# Altium PCB Project_MachNguon.PcbDoc
Units mm, origin at the board's own origin, x right, y up, seen from the top; angles counter-clockwise.
Board outline 93.1 x 50.04 mm, 2 copper layers (Top Layer, Bottom Layer); 54 components, 33 nets, 136 pads, 11 vias.
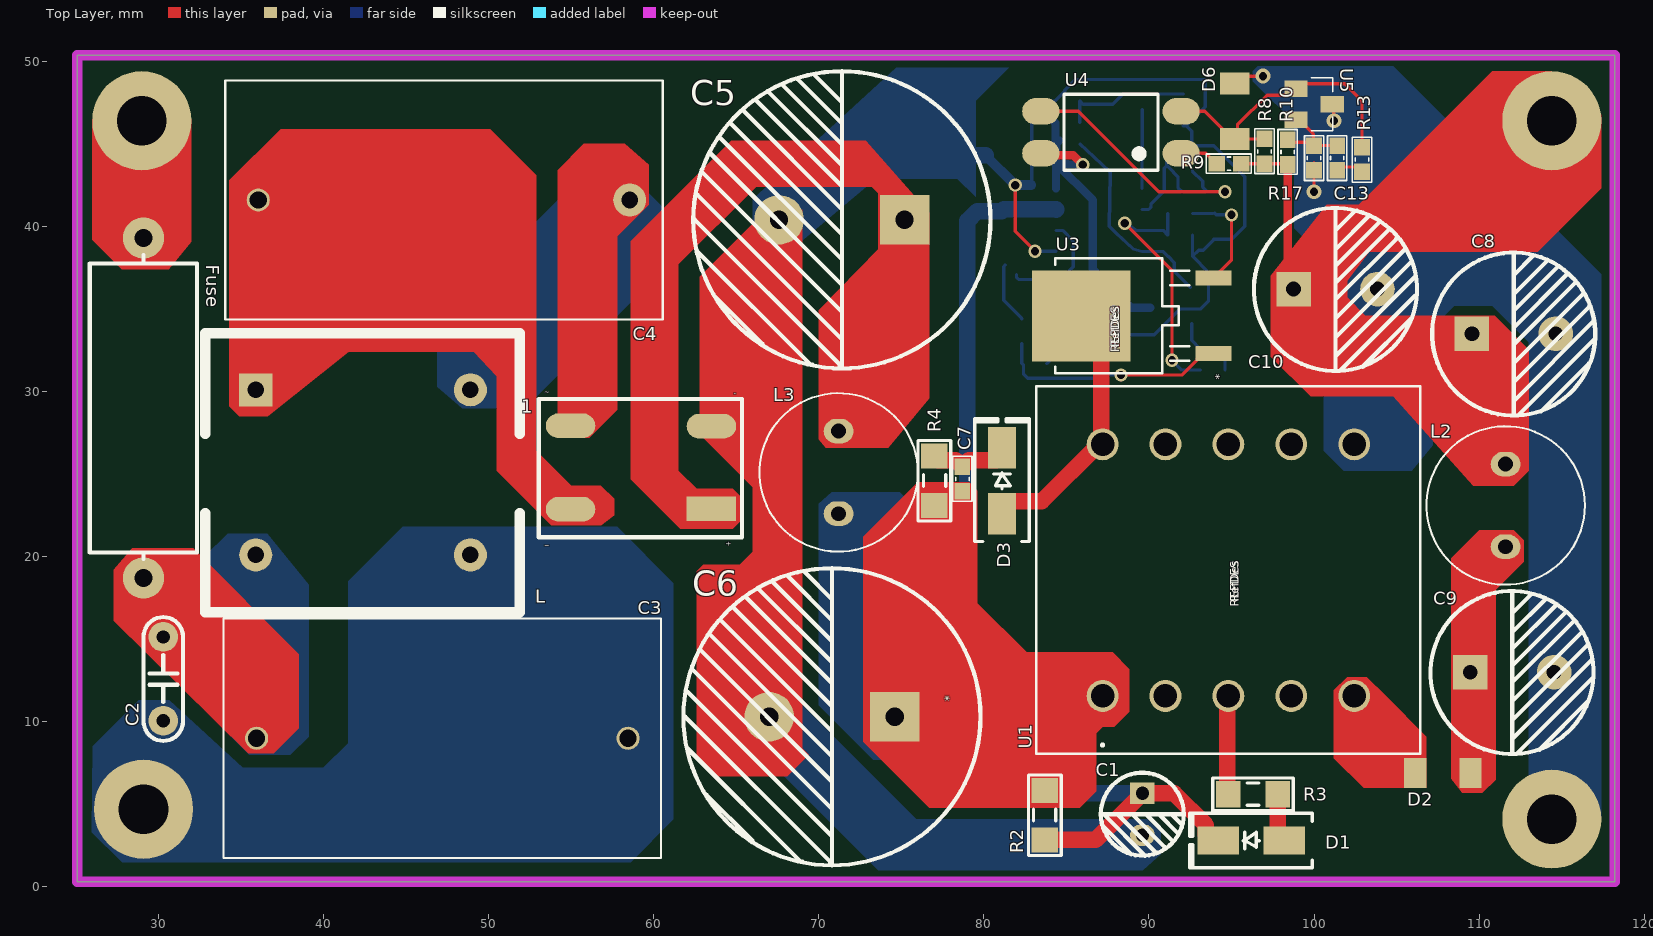
[diagram p0: Top Layer view]
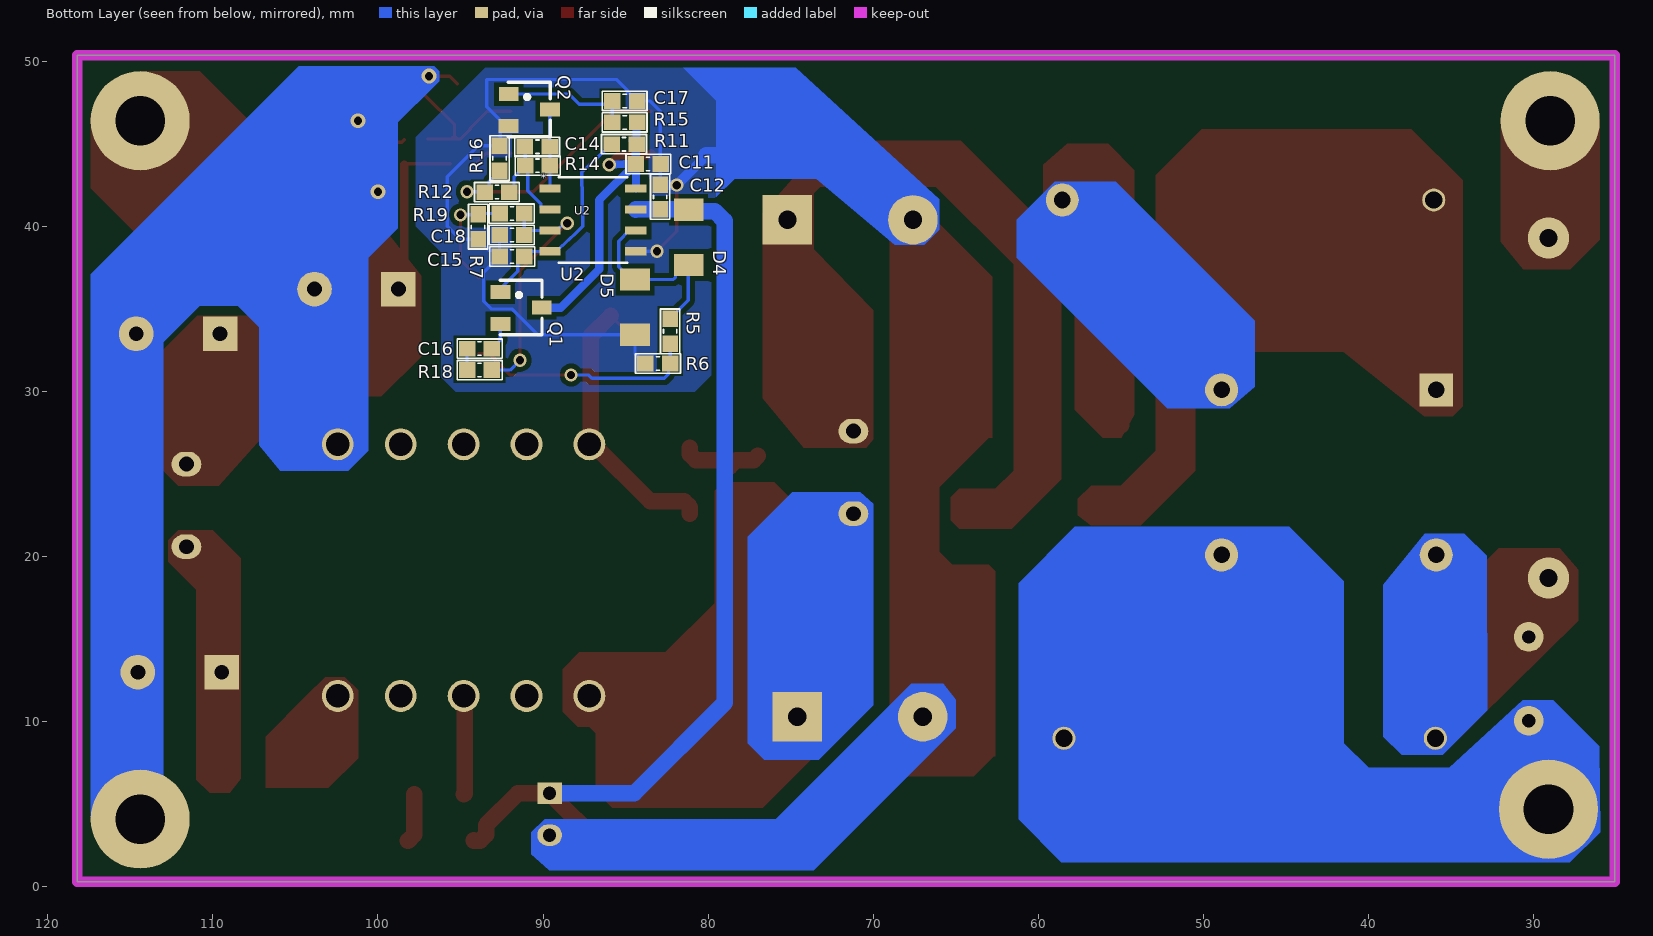
[diagram p1: Bottom Layer view, seen from below]
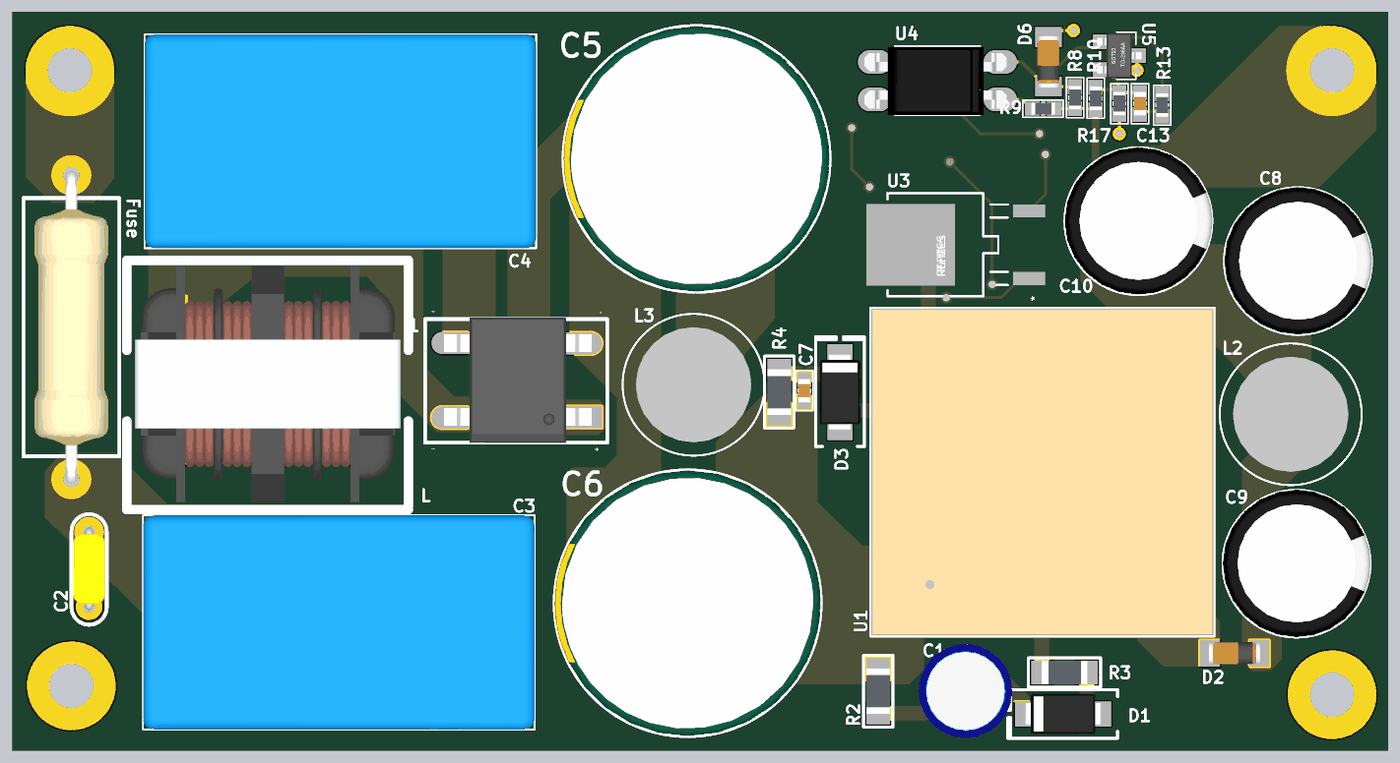
[diagram p2: 3D render of the assembled board from above, using the file's embedded part models]
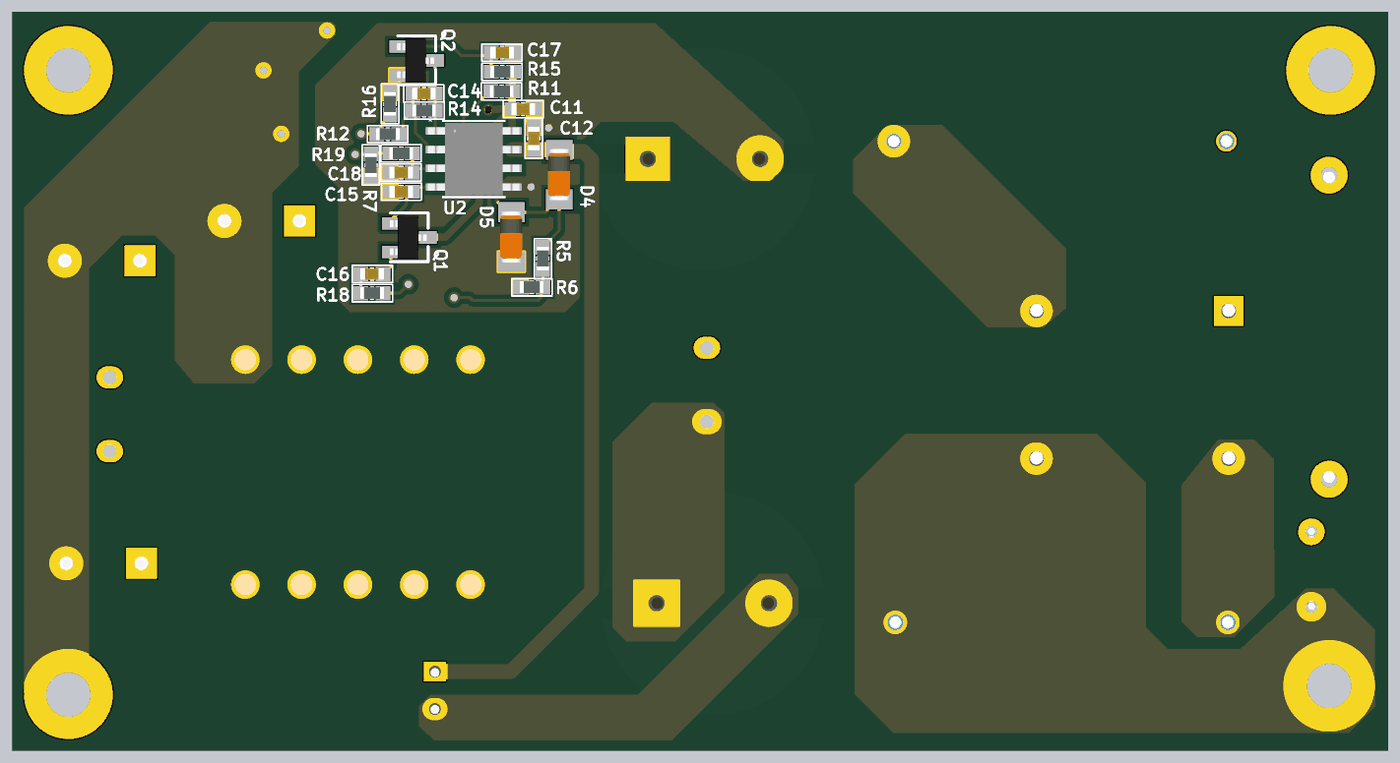
[diagram p3: 3D render of the assembled board from below, using the file's embedded part models]

## Layer stack, top to bottom
Top Solder: solder mask 0.0102, Solder Resist, Dk 3.5
Top Layer: signal copper 0.0356
Dielectric 1: dielectric 0.32, FR-4, Dk 4.8
Bottom Layer: signal copper 0.0356
Bottom Solder: solder mask 0.0102, Solder Resist, Dk 3.5

## Board outline
25.1,0.318 25.1,50.355 118.2,50.355 118.2,0.318

## Design rules (kind name [scope] priority, off if disabled: settings)
Clearance [All] p1: gap=0.3 ignorepadtopadclearanceinfootprint=FALSE
Height [All] p1 off: minheight=0 maxheight=25.4 prefheight=12.7
PolygonConnect [All] p1: connectstyle=Direct reliefconductorwidth=0.254 reliefentries=4 polygonreliefangle="90 Angle" airgapwidth=0.254
RoutingVias [All] p1: holewidth=0.711 width=1.27 viastyle="Through Hole" minholewidth=0.711 minwidth=1.27 maxholewidth=0.711 maxwidth=1.27
SolderMaskExpansion [All] p1: expansion=0.102 istentingtop=FALSE
SupplyNets "Schematic Supply Nets_1" [InNet('A_GND')] p1: voltage=0.000
SupplyNets "Schematic Supply Nets" [InNet('GND')] p2: voltage=0.000
Width [All] p1: maxlimit=1 minlimit=0.2 preferedwidth=0.2
29 further rules are at their usual default settings.

## Components (designator, comment, footprint, x,y, rotation, side; value= is the part's Value field where it differs from the comment)
1 "1A 1000V" "DIODE CAU 1A SMD SOP4" 63.5,22.9 r90 top
C1 "120uF" "tu hoa 5mm" 89.6,4.4 r270 top
C2 "750V" "tu tantalum dip5.08" 30.3,12.6 r270 top
C3 "B32923P3155K000" CAPRR2250W80L2650T1450H2950#1 47.2,9 r180 top
C4 "B32923P3155K000" CAPRR2250W80L2650T1450H2950#2 47.3,41.6 r180 top
C5 "10uF" "tu Hoa 18mm" 71.4,40.4 r0 top
C6 "10uF" "tu Hoa 18mm" 70.8,10.3 r0 top
C7 "10nF" "tu 0603" 78.7,24.7 r90 top
C8 "10uF" "tu hoa 10mm" 112.1,33.5 r0 top
C9 "10uF" "tu hoa 10mm" 112,13 r0 top
C10 "10uF" "tu hoa 10mm" 101.3,36.2 r0 top
C11 "1uF" "tu 0603" 83.633,43.779 r180 bottom
C12 "0.1uF" "tu 0603" 82.908,41.787 r90 bottom
C13 "0.01uF" "tu 0603" 101.4,44.15 r270 top
C14 "10nF" "tu 0603" 90.346,44.824 r0 bottom
C15 "1000pF" "tu 0603" 91.883,38.179 r180 bottom
C16 "10nF" "tu 0603" 93.85,32.6 r180 bottom
C17 "0.1uF" "tu 0603" 85.05,47.6 r0 bottom
C18 "100pF" "tu 0603" 91.883,39.479 r0 bottom
D1 "M7" "DIODE SMA" 96.2,2.8 r180 top
D2 "12V" "DIODE ZENNER SMD SOD80" 107.8,6.9 r180 top
D3 "M7" "DIODE SMA" 81.1,24.6 r90 top
D4 "24V" "DIODE ZENNER SMD SOD80" 81.183,39.34 r270 bottom
D5 "24V" "DIODE ZENNER SMD SOD80" 84.433,35.11 r270 bottom
D6 "10V" "DIODE ZENNER SMD SOD80" 95.2,46.975 r90 top
Fuse "50" "tro vach 2w" 29.1,29 r270 top
L "7416-RC" 7416-RC 35.9,30.1 r0 top
L2 "RFB0810-122L" IND_P220_D378_H452_70X59_TH 111.6,23.1 r90 top
L3 "RFB0810-122L" IND_P220_D378_H452_70X59_TH 71.2,25.1 r270 top
Q1 "HF" SOT-23 91.333,35.085 r270 bottom value=C9014
Q2 "HF" SOT-23 90.833,47.079 r270 bottom value=C9014
R2 "100k" "RES 1206" 83.693,4.34 r90 top
R3 "22R" "RES 1206" 96.3,5.6 r0 top
R4 "50K" "RES 1206" 77,24.6 r270 top
R5 "?" "RES 0603" 82.3,33.65 r270 bottom
R6 "?" "RES 0603" 83.05,31.7 r180 bottom
R7 "?" "RES 0603" 93.933,39.979 r90 bottom
R8 "?" "RES 0603" 97,44.55 r90 top
R9 "?" "RES 0603" 94.85,43.8 r180 top
R10 "?" "RES 0603" 98.4,44.5 r90 top
R11 "?" "RES 0603" 85.083,44.979 r0 bottom
R12 "?" "RES 0603" 92.783,42.079 r0 bottom
R13 "?" "RES 0603" 102.9,44.05 r270 top
R14 "?" "RES 0603" 90.333,43.679 r180 bottom
R15 "?" "RES 0603" 85.05,46.3 r0 bottom
R16 "?" "RES 0603" 92.633,44.129 r90 bottom
R17 "?" "RES 0603" 100,44.15 r270 top
R18 "?" "RES 0603" 93.85,31.3 r180 bottom
R19 "?" "RES 0603" 91.883,40.779 r0 bottom
U1 "750312279" 750312279_WRE 87.19,11.56 r90 top
U2 "UC3842BD1G" SOIC8_ONS-L 86.977,40.39 r180 bottom
U3 "STD2NK100Z" DPAK_STM-L 87.563,34.586 r90 top
U4 "OPTO PC817 SMD" SOP4 87.7,45.7 r180 top value=PC817
U5 "TL431ACDBZT" "SOT 23-3" 100,47.4 r180 top

## Footprints (in the part's own frame and the unit in brackets; to place one, negate y for a bottom-side part, rotate by r counter-clockwise, add the part's x,y. Pads: shape width x height; smd on the part's side, far side on the other; paste and mask are expansions set on the pad)
7416-RC [mm]
  rect 2x2 hole 1: 1(0,0)
  round 2 hole 1: 2(0,-10) 3(13,-10) 4(13,0)
  silkscreen extent -3.05,-13.46 16,3.43, body extent -2.51,-12.95 15.49,3.05, height 17.5
750312279_WRE [mil]
  round 76 / inner round 60 / far side round 76 hole 56 paste-99999 mask+0: 1(0,0) 2(0,-150) 3(0,-300) 4(0,-450) 5(0,-600) 6(600,-600) 7(600,-450) 8(600,-300) 9(600,-150) 10(600,0)
  silkscreen extent -138,-758 738,158, body extent -133,-753 733,153, height 690
CAPRR2250W80L2650T1450H2950#1 [mm]
  round 1.4 hole 1.05: 1(-11.25,0) 2(11.25,0)
  silkscreen extent -13.25,-7.25 13.25,7.25, body extent -13.25,-7.25 13.25,7.25, height 29.5
CAPRR2250W80L2650T1450H2950#2 [mm]
  round 2 hole 1: 1(-11.25,0)
  round 1.4 hole 1.05: 2(11.25,0)
  silkscreen extent -13.25,-7.25 13.25,7.25, body extent -13.25,-7.25 13.25,7.25, height 29.5
"DIODE CAU 1A SMD SOP4" [mm] "SOP4"
  rect 1.5x3 smd: 1(0,0)
  oval 1.5x3 smd: 2(5.029,8.534) 3(5,0) 4(-0.025,8.534)
  silkscreen extent -1.73,-1.85 6.65,10.46, body extent -1.74,-0.81 6.76,9.19, height 2.93
"DIODE SMA" [mm] "SMA"
  rect 2.5x1.7 smd: 1(-2,0) 2(2,0)
  silkscreen extent -3.68,-1.65 3.75,1.65, body extent -2.6,-1.37 2.6,1.37, height 2.4
"DIODE ZENNER SMD SOD80" [mm] "SOD80"
  rect 1.35x1.8 smd: 1(1.675,0) 2(-1.675,0)
  body extent -1.75,-0.76 1.75,0.74, height 1.45
DPAK_STM-L [mil]
  rect 35x86 smd paste+0 mask+0: 1(-90,-249.5) 2(90,-249.5)
  rect 217x236 smd paste+0 mask+0: 3(0,65.5)
  silkscreen extent -138,-192 138,128
IND_P220_D378_H452_70X59_TH [mm] "Inductor"
  oval 1.5x1.8 hole 0.9: 1(-2.5,0) 2(2.5,0)
  silkscreen extent -4.8,-4.8 4.8,4.8, body extent -3.9,-3.9 3.9,3.9, height 7.82
"RES 0603" [mm] "RES 0603"
  rect 1x0.95 smd mask+0.076: 1(-0.75,0) 2(0.75,0)
  silkscreen extent -1.35,-0.58 1.37,0.58, body extent -0.8,-0.4 0.8,0.4, height 0.45
"RES 1206" [mm]
  rect 1.5x1.6 smd: 1(-1.5,0) 2(1.5,0)
  silkscreen extent -2.44,-0.99 2.44,0.99, body extent -1.55,-0.8 1.55,0.8, height 0.55
SOIC8_ONS-L [mil]
  rect 51x20 smd paste+0 mask+0: 1(-102.5,75) 2(-102.5,25) 3(-102.5,-25) 4(-102.5,-75) 5(102.5,-75) 6(102.5,-25) 7(102.5,25) 8(102.5,75)
  silkscreen extent -82,-102 82,102, body extent -122,-96 122,96, height 69
SOP4 [mm]
  oval 2.25x1.6 smd: 1(-4.25,1.27) 2(-4.25,-1.27) 3(4.25,-1.27) 4(4.25,1.27)
  silkscreen extent -2.85,-2.3 2.85,2.3, body extent -4.67,-2.29 4.93,2.31, height 3.6
"SOT 23-3" [mm] "Case: SOT23"
  rect 1.4x1 smd paste+0 mask+0.076: 1(1.1,-0.95) 2(1.1,0.95) 3(-1.1,0)
  silkscreen extent -1.12,-1.6 0.18,1.6, body extent -1.5,-1.5 1.5,1.5, height 1.3
SOT-23 [mm] "SOT 23 _ 1-3-2"
  rect 0.85x1.2 smd: 1(-0.94,-1.245) 2(0.985,-1.25) 3(0.005,1.25)
  silkscreen extent -1.65,-1.27 1.65,1.27, body extent -1.47,-1.33 1.53,1.17, height 1.06
"tro vach 2w" [mm]
  round 2.5 hole 1.1: 1(-10.3,0) 2(10.3,0)
  silkscreen extent -9.27,-3.25 9.14,3.25, body extent -10.56,-2.5 10.56,2.5, height 5.5
"tu 0603" [mm] "Chip Capacitor, 2-Leads, Body 1,60x0,80mm, IPC Medium Density"
  rect 1x0.95 smd mask+0.076: 1(-0.75,0) 2(0.75,0)
  silkscreen extent -1.35,-0.58 1.37,0.58, body extent -0.8,-0.4 0.8,0.4, height 0.9
"tu hoa 5mm" [mm]
  rect 1.3x1.5 hole 0.8: 1(-1.27,0)
  oval 1.3x1.5 hole 0.8: 2(1.27,0)
  silkscreen extent -2.51,-2.51 2.51,2.51, body extent -3.12,-3.18 3.23,3.18, height 14.55
"tu hoa 10mm" [mm]
  rect 2.1x2.1 hole 0.9: 1(-2.54,0)
  round 2.1 hole 0.9: 2(2.54,0)
  silkscreen extent -4.95,-4.96 4.93,4.92, body extent -5,-5 4.97,5, height 20.01
"tu Hoa 18mm" [mm]
  rect 3x3 hole 1.1: 1(3.8,0)
  round 3 hole 1.1: 2(-3.8,0)
  silkscreen extent -9,-9 9,9, body extent -9.01,-9 9,9, height 3
"tu tantalum dip5.08" [mm]
  round 1.8 hole 0.8: 1(-2.54,0) 2(2.54,0)
  silkscreen extent -3.74,-1.2 3.76,1.2, body extent -2.82,-1.08 2.77,1.08, height 6.27

## Part data
1: library part "Diode CAU 1A SMD", "Dán", Chung_Loai=Dán, Don_Vi=Con, Ma_Hang=MH009806, Ten_Linh_Kien="DBS10 SOP4 Diode Cầu 1A 1000V"
C1: library part "Tu Hoa 100uF 25V 6x11", "Cắm", Chung_Loai=Cắm, Don_Vi=Con, Ma_Hang=MH001351, So_Chan=2, Ten_Linh_Kien="Tụ Hóa 100uF 25V 6x11MM"
C2: library part "Tu tantalum 100pF DIP5.08", "Cắm", Chung_Loai=Cắm, Don_Vi=Con, Ma_Hang=MH006964, So_Chan=2, Ten_Linh_Kien="Tụ tantalum 101-100pF DIP5.08 (sứ vàng)"
C3 C4: "SUPPRESSION CAP, 1.5UF, CLASS X2, 305VAC ROHS COMPLIANT: YES", Package="NON-STANDARD-2 TDK", Check_prices=https://www.snapeda.com/parts/B32923P3155K000/TDK/view-part/?ref=eda, MF="TDK Electronics", MP=B32923P3155K000, SnapEDA_Link=https://www.snapeda.com/parts/B32923P3155K000/TDK/view-part/?ref=snap
C5 C6: library part "Tu Hoa 100uF 450V 18x35", "Cắm", Chung_Loai=Cắm, Don_Vi=Con, Ma_Hang=MH003953, So_Chan=2, Ten_Linh_Kien="Tụ Hóa 100uF 450V 18x35MM"
C7: library part "Tu 0603 105 50V 10%", "Dán", Chung_Loai=Dán, Don_Vi=Con, Ma_Hang=MH004569, So_Chan=2, Ten_Linh_Kien="Tụ 0603 105-1uF 50V 10%"
C8 C9 C10: library part "Tu Hoa 1000uF 10V 10x12", "Cắm", Chung_Loai=Cắm, Don_Vi=Con, Ma_Hang=MH006614, So_Chan=2, Ten_Linh_Kien="Tụ Hóa 1000uF 10V 10x12MM"
C11 C12 C13 C14 C15 C16 C17 C18: library part "Tu 0603 101 50V 10%", "Dán", Chung_Loai=Dán, Don_Vi=Con, Ma_Hang=MH004565, So_Chan=2, Ten_Linh_Kien="Tụ 0603 101-0.1nF 10% 50V"
D1 D3: library part "Diode M7 ( 4007 )", "Dán", Chung_Loai=Dán, Don_Vi=Con, Ma_Hang=MH000944, Ten_Linh_Kien="Diode M7 1N4007 SMD 1A 1000V"
D2 D6: library part "Diode Zener 12V", "Dán", Chung_Loai=Dán, Don_Vi=Con, Ma_Hang=MH000945, Ten_Linh_Kien="Diode Zener 1/2W 12V SMD1206 ZMM12"
D4 D5: library part "Diode Zener 24V", "Cắm", Chung_Loai=Cắm, Don_Vi=Con, Ma_Hang=MH002878, Ten_Linh_Kien="Diode Zener 1/2W 24V DIP 1N5252B"
Fuse: library part "Tro Vach 2W 5% 100R", "Cắm", Chung_Loai=Cắm, Don_Vi=Con, Ma_Hang=MH006357, So_Chan=2, Ten_Linh_Kien="Trở 5% 2w 100R"
L2 L3: library part IND_1.2mH-0.47A-10%-TH, "Fixed Inductors RFB0810 AEC-Q200 100kHz 2.8mOhms", Alternate Part Number-1=NA, Case/Package=TH, Manufacturer=Coilcraft, Manufacturer Part Number=RFB0810-122L, Supplier Part Number-1=RFB0810-122L, Supplier-1="COILCRAFT SAMPLE"
Q1 Q2: library part "Trans C1815 HF SMD", "SOT-23"
R2 R3 R4: library part "RES 1206", "RES SMD 1206", Manufacturer="Vishay Dale", Manufacturer Part Number=CRCW040210K0FKED, Operating Temperature="-55°C ~ 155°C", Package / Case="0402 (1005 Metric)", Power (Watts)="0.063W, 1/16W", Resistance (Ohms)=10k, Supplier Part Number 1=541-10.0KLCT-ND, Temperature Coefficient=±100ppm/°C, Tolerance=±1%, Category=Resistors, ComponentLink1Description=http://www.vishay.com/docs/20035/dcrcwe3.pdf, ComponentLink1URL=http://www.vishay.com/docs/20035/dcrcwe3.pdf, Composition="Thick Film", Features="Automotive AEC-Q200", Height="0.016\" (0.40mm)", Number of Terminations=2, Packaging="Cut Tape (CT)", Pricing 1="10=0.083, 50=0.0444, 200=0.0255, 1000=0.0174 (USD)", RoHS="RoHS Compliant", Size / Dimension="0.039\" L x 0.020\" W (1.00mm x 0.50mm)", Stock 1=2392462, Supplier 1=Digi-Key, Supplier Device Package="0402 (1005 Metric)"
R5 R6 R7 R8 R9 R10 R11 R12 R13 R14 R15 R16 R17 R18 R19: library part "RES 0603", "RES SMD 0603", Manufacturer="Vishay Dale", Manufacturer Part Number=CRCW040210K0FKED, Operating Temperature="-55°C ~ 155°C", Package / Case="0402 (1005 Metric)", Power (Watts)="0.063W, 1/16W", Resistance (Ohms)=10k, Supplier Part Number 1=541-10.0KLCT-ND, Temperature Coefficient=±100ppm/°C, Tolerance=±1%, Category=Resistors, ComponentLink1Description=http://www.vishay.com/docs/20035/dcrcwe3.pdf, ComponentLink1URL=http://www.vishay.com/docs/20035/dcrcwe3.pdf, Composition="Thick Film", Features="Automotive AEC-Q200", Height="0.016\" (0.40mm)", Number of Terminations=2, Packaging="Cut Tape (CT)", Pricing 1="10=0.083, 50=0.0444, 200=0.0255, 1000=0.0174 (USD)", RoHS="RoHS Compliant", Size / Dimension="0.039\" L x 0.020\" W (1.00mm x 0.50mm)", Stock 1=2392462, Supplier 1=Digi-Key, Supplier Device Package="0402 (1005 Metric)"
U1: "Description", Manufacturer_Name="Wurth Electronics", Copyright="Copyright (C) 2025 Ultra Librarian. All rights reserved.", Manufacturer_Part_Number=750312279, RefDes=RefDes, Type=Type
U2: "No Description Available", Manufacturer_Name=onsemi, Copyright="Copyright (C) 2025 Ultra Librarian. All rights reserved.", Manufacturer_Part_Number=UC3842BD1G, RefDes=RefDes, Type=Type
U3: "N-channel 1000 V, 6.25 Ohm typ., 1.85 A SuperMESH Power MOSFET in a DPAK package", Manufacturer_Name=STMicroelectronics, Copyright="Copyright (C) 2025 Ultra Librarian. All rights reserved.", Manufacturer_Part_Number=STD2NK100Z
U4: "Single Opto"
U5: library part IC_TL431ACDBZT, "Shunt Voltage Reference IC 36V ±1% SOT-23-3", Alternate Part Number-1=NA, Case/Package=SOT-23, Manufacturer="Texas Instruments", Supplier Part Number-1=595-TL431ACDBZT, Manufacturer Part Number=TL431ACDBZT, Supplier-1=Mouser

## Free pads (board coordinates)
  round 6 hole 3: 10(29,46.4) 10(29.1,4.7) 10(114.4,4.1) 10(114.4,46.4)

## Via types
v1: diameter 0.8, hole 0.5, Top Layer to Bottom Layer, tented both sides, 8 vias
v2: diameter 0.9, hole 0.5, Top Layer to Bottom Layer, 3 vias

## Nets (pads, with @x,y where several pads share a name; then routed paths per layer and width w, separated by ;. In a path a pad name is that pad's centre, name@x,y a point inside that pad or via, vN(x,y) a via of type N, cw(c..) or ccw(c..) an arc to the next point about the centre after c; other vN are vias at no path point)
A_GND: 1.3 C1.2 C5.2 C6.2 C11.2 C12.2 C15.1 C17.1 C18.2 D5.1 Q2.2 R6.1 R7.1 R16.2 U2.5 | length 131.8
  Top Layer w0.2: v1(81.9,42.5) 81.9,39.7 v1(83.1,38.5)
  Top Layer w1: C6.2@66.8,10.5 66.8,10.986 67.9,12.086 67.9,24.2 64.2,27.9 1.3 63.869,27.9 64.1,28.131 64.1,36.9 C5.2
  Bottom Layer w0.2: C12.2@82.871,42.5 C12.2 82.908,43.753 C11.2 82.908,43.804 82.908,46.969 83.539,47.6 C17.1 84.325,47.6 84.9,48.175 84.9,48.241 85.559,48.9 93.4,48.9 93.4,47.235 Q2.2@92.258,46.093 ; v1(83.1,38.5) 83.108,38.492 84.366,38.492 U2.5 ; R6.1 83.825,31.7 84.433,32.308 D5.1 90.328,33.435 91.893,35 93.143,35 93.6,35.457 93.6,37.237 92.658,38.179 C15.1 ; Q2.2 Q2.2@92.258,46.093 ; C18.2 C15.1 ; Q2.2@92.258,46.093 92.583,45.768 92.583,44.929 R16.2 93.921,44.879 95.8,43 95.8,40 95.029,39.229 R7.1 93.933,39.204 93.283,38.554 93.008,38.554 C15.1
  Bottom Layer w0.6: 80.1,44.3 v1(81.9,42.5) C12.2@82.871,42.5
  Bottom Layer w1: C6.2@66.8,10.5 74.17,3.13 C1.2 ; C5.2 71.5,44.3 80.1,44.3
COMP: C14.1 Q2.3 R14.2 U2.1 | length 4.8
  Bottom Layer w0.2: U2.1 89.581,43.676 R14.2 89.583,44.811 C14.1 89.596,47.061 Q2.3
GND: C8.2 C9.2 C10.2 D6.1 pad.10@114.4,4.1 R17.2 U1.6 U5.3 | length 73.4
  Top Layer w0.2: D6.1 95.65,49.1 v2(96.9,49.1) ; v2(100,42.1) R17.2@100,43.85 ; U5.3 101.2,47.3 v2(101.2,46.4)
  Bottom Layer w0.2: v2@97.2,49.1 98.5,49.1 v2(101.2,46.4) 101.2,43.5 100.434,42.734 100.434,42.723 100,42.289 100,40.04 C10.2 102.43,34.79 U1.6
  Bottom Layer w1: C10.2 110.8,36.2 114.54,32.46 114.54,14.061 ; pad.10@113.96,4.1 114.4,4.1 114.47,4.17 114.47,12.93 C9.2 ; C9.2@114.242,13 C9.2 ; C9.2@114.54,14.018 C9.2
Net1_1: 1.1 C5.1 L3.1 | length 51
  Top Layer w1: 1.1 63.25,23.15 62.45,23.15 60.2,25.4 60.2,38.8 65,43.6 72.7,43.6 74.2,42.1 74.2,41.4 C5.1 75.2,31.45 71.35,27.6 L3.1
Net1_2: 1.2 C4.1 L.4 | length 31
  Top Layer w1: 1.2@54.993,27.957 55.608,27.957 55.811,28.16 55.811,28.775 56.1,29.064 56.1,39.15 C4.1
  Bottom Layer w1: L.4 48.9,31.95 C4.1
Net1_4: 1.4 C4.2 L.1 | length 45.8
  Top Layer w1: L.1 35.9,41.342 36.05,41.492 C4.2 36.85,42.4 47.2,42.4 52.4,37.2 52.4,25.44 1.4
NetC1_1: C1.1 C12.1 D1.2 D4.2 R2.1 U2.7 | length 60.9
  Top Layer w1: R2.1 86.77,2.84 C1.1@89.35,5.42 ; C1.1@89.35,5.52 89.7,5.52 89.85,5.67 91.524,5.67 93.45,3.744 93.45,3.15 93.8,2.8 D1.2 D1.2@94.185,2.815
  Bottom Layer w1: U2.7 84.361,41.037 C12.1 81.205,41.037 81.083,40.915 79.586,40.915 79,40.329 79,11.142 84.472,5.67 C1.1
NetC2_1: C2.1 C3.2 Fuse.2 L.2 | length 12.2
  Top Layer w1: Fuse.2@30.3,18.8 C2.1 35.95,9.49 C3.2 ; L.2 L.2@35.925,20.075
NetC2_2: C2.2 C3.1 L.3 pad.10@29.1,4.7 | length 51.5
  Top Layer w1: pad.10@29.1,4.7 pad.10@29.2,4.8
  Bottom Layer w1: pad.10@29.1,4.7 29.2,4.8 29.2,10.06 29.3,10.16 ; pad.10@30.1,4.6 54.05,4.6 C3.1 58.373,9.077 58.373,10.627 L.3 48.709,19.909 L.3@48.709,19.637
NetC6_1: C6.1 C7.1 L3.2 R2.2 R4.2 U1.1 | length 48.6
  Top Layer w1: R4.2 76.75,22.85 76.7,22.85 74.8,20.95 74.8,10.9 74.4,10.5 C6.1 79.06,5.84 R2.2 83.693,9.913 85.38,11.6 87.15,11.6 U1.1 ; R4.2@77.25,23.35 78.114,23.35 78.7,23.936 C7.1
  Bottom Layer w1: L3.2 71.2,13.7 C6.1
NetC7_2: C7.2 D3.2 R4.1 | length 5.1
  Top Layer w1: R4.1 77.25,25.85 78.3,25.85 C7.2 79.1,25.85 80.75,25.85 81.1,26.2 D3.2
NetC8_1: C8.1 C10.1 L2.2 pad.10@114.4,46.4 R8.1 R9.1 R10.1 | length 50.6
  Top Layer w0.2: R9.1 R8.1 98.35,43.8 R10.1
  Top Layer w0.5: R10.1 98.4,36.56 C10.1
  Top Layer w1: 109.16,32.2 101.7,32.2 99.31,34.59 99.31,35.65 C10.1 108.96,46.4 pad.10@114.4,46.4 ; 109.56,31.8 109.9,31.46 109.9,30.5 111,29.4 111,24.9
NetC9_1: C9.1 D2.2 L2.1 | length 13.6
  Top Layer w1: D2.2@109.46,6.915 C9.1 109.46,18.375 110.985,19.9 111,19.9
NetC13_1: C13.1 R10.2 R17.1 U5.2 | length 5.3
  Top Layer w0.2: R10.2 98.55,45.1 99.8,45.1 R17.1 ; U5.2 99.1,46.45 99.95,45.6 99.95,45.25 99.95,44.95 R17.1 ; C13.1 R17.1
NetC13_2: C13.2 R13.2 | length 1.5
  Top Layer w0.2: C13.2@101.4,43.65 101.45,43.6 R13.2@102.9,43.6
NetC14_2: C14.2 R12.1 R14.1 U2.2 | length 6.7
  Bottom Layer w0.2: U2.2 89.974,41.025 90.128,41.179 90.128,41.375 90.921,42.167 90.921,43.516 R14.1 ; C14.2 91.083,44.811 R14.1 ; R12.1 91.758,42.354 91.758,43.004 91.483,43.279 91.483,43.304 91.108,43.679 R14.1
NetC15_2: C15.2 Q1.1 R11.2 U2.4 | length 12.4
  Bottom Layer w0.2: R11.2 86.233,44.604 87.586,43.335 87.647,43.275 87.647,43.19 87.6,40.084 87.6,40 87.658,39.942 87.962,39.635 ccw(c88.531,40.197) 87.987,39.611 89.033,38.639 U2.4 90.827,38.485 C15.2 91.158,38.179 91.533,37.804 91.533,37.288 Q1.1@92.503,36.318
NetC16_1: C16.1 R18.1 | length 1.3
  Bottom Layer w0.2: R18.1 C16.1
NetC16_2: C16.2 Q1.2 | length 1.7
  Bottom Layer w0.2: Q1.2 92.583,33.092 93.075,32.6 C16.2
NetC17_2: C17.2 Q2.1 R15.2 | length 7.9
  Bottom Layer w0.2: R15.2 C17.2 86,47.4 87.8,47.4 88.418,48.018 Q2.1
NetC18_1: C18.1 R18.2 R19.1 U2.3 | length 15.6
  Top Layer w0.2: v1(88.531,40.197) 91.4,37.329 v1(91.4,31.9)
  Bottom Layer w0.2: v1(88.531,40.197) 89.033,39.909 89.187,39.755 U2.3 90.857,39.755 C18.1 R19.1 ; v1(91.4,31.9) 92,31.3 R18.2
NetD1_1: D1.1 R3.2 | length 3
  Top Layer w1: R3.2 97.8,3.15 98.15,2.8 D1.1
NetD2_1: D2.1 U1.5 | length 7.7
  Top Layer w1: U1.5 102.43,8.27 103.8,6.9 D2.1@106.25,6.9
NetD3_1: D3.1 U1.10 U3.3 | length 17
  Top Layer w0.2: U3.3@85.38,34.067 U3.3
  Top Layer w1: D3.1 81.1,23 81.45,23.35 83.51,23.35 86.96,26.8 U1.10 ; U3.3 87.1,33.385 U1.10@87.1,26.9
NetD4_1: D4.1 D5.2 R5.1 U2.6 | length 10.6
  Bottom Layer w0.2: D4.1@81.295,37.665 81.2,37.569 81.2,35.525 82.3,34.425 R5.1 ; D4.1@81.983,37.09 81.983,36.902 82.1,36.785 84.658,36.785 85.421,37.548 85.421,39.101 84.767,39.755 U2.6
NetD6_2: D6.2 R8.2 R13.1 U4.2 U5.1 | length 18.3
  Top Layer w0.2: U4.2 93.375,46.97 94.4,45.945 94.4,45.875 94.975,45.3 D6.2 ; D6.2@95.5,45.375 D6.2@95.5,45.3 ; R8.2 D6.2@95.5,45.3 ; R13.1@102.9,45.1 102.9,47.6 101.865,48.635 99.315,48.635 99.25,48.7 U5.1 98.5,47.95 97.15,47.95 95.358,46.158 95.358,45.458 D6.2 ; D6.2 D6.2@95.5,45.3
NetFuse_1: Fuse.1 pad.10@29,46.4 | length 7.1
  Top Layer w1: pad.10@29,46.4 29.1,46.3 29.1,39.5 Fuse.1@29.2,39.4
NetR3_1: R3.1 U1.3 | length 6
  Top Layer w1: U1.3@94.75,11.55 94.75,5.65 R3.1
NetR5_2: R5.2 R6.2 U3.1 | length 14.4
  Top Layer w0.2: v1@88.3,30.7 88.6,31 92,31 92.908,31.908 92.908,31.955 93.252,32.3 U3.1
  Bottom Layer w0.2: R5.2 R6.2 82.402,31.598 82.402,31.042 82.644,30.8 87.038,30.8 87.238,31 88,31 v1@88.3,30.7
  other v1: 88.3,31
NetR9_2: R9.2 U4.1 | length 2.4
  Top Layer w0.2: U4.1 93.445,44.43 94.075,43.8 R9.2
NetR12_2: R12.2 R16.1 U4.3 | length 15.9
  Top Layer w0.2: U4.3 85.73,46.97 90.6,42.1 v1(94.6,42.1)
  Bottom Layer w0.2: R16.1 92.633,43.354 93.25,42.736 93.25,42.386 93.558,42.079 93.579,42.1 v1(94.6,42.1)
R_ISENSE: R7.2 R19.2 U3.2 | length 6.6
  Top Layer w0.2: U3.2 95,37.972 v1(95,40.7)
  Bottom Layer w0.2: R19.2 R7.2@93.883,40.779 ; R7.2@93.977,40.797 94.074,40.7 v1(95,40.7)
VREF: C11.1 Q1.3 R11.1 R15.1 U2.8 U4.4 | length 20.5
  Top Layer w0.5: U4.4 83.565,44.315 85.409,44.315 v1(85.988,43.737)
  Bottom Layer w0.5: R15.1 84.333,46.267 R11.1 84.358,44.979 R11.1@84.583,45.204 ; U2.8 84.374,43.769 C11.1 ; R11.1@84.383,44.929 C11.1 ; C11.1@84.408,43.779 86.6,41.587 86.6,37.4 88.92,35.08 Q1.3 ; v1(85.988,43.737) 85.081,43.785 84.633,43.785 C11.1
pads on no net: U1.2 U1.4 U1.7 U1.8 U1.9

## Polygon pours and split planes (outlines as drawn)
A_GND on Bottom Layer "NONET_L-01_P-001" (solid, remove dead copper, pour order 0): 79.5,31.3 80.8,30 95.3,30 96.15,30.85 96.15,38.45 97.7,40 97.7,45.4 93.5,49.6 81.5,49.6 79.5,47.6

## Keep-outs
Keep-Out Layer:
  the board outline again, w0.635

## Other copper
Top Layer:
  region net NetC8_1: 109.641,24.3 112.1,24.3 113,25.2 113,32.536 110.936,34.6 103.1,34.6 102,35.7 102,36.704 103.329,38.467 113.549,38.467 117.4,42.319 117.4,46.75 114.371,49.4 110.8,49.4 102.7,41.3 100.763,41.3 97.383,37 97.383,36.6 97.383,32.117 99.8,29.7 104.781,29.7
  region net NetC9_1: 108.98,5.7 110.2,5.7 111,6.5 111,18 112.7,19.7 112.7,21 112.1,21.6 110,21.6 108.3,19.9 108.3,6.55
  region net NetD2_1: 101.2,11.902 101.2,7.8 103,6 106.8,6 106.8,9.1 104.3,11.6 103.2,12.7 101.998,12.7
  region net NetC2_1: 27.3,19.214 28.425,20.5 32.1,20.5 38.5,14.1 38.5,9.6 37,8.1 35.454,8.1 27.3,16.118
  region net Net1_1: 61.5,25.2 61.5,37.7 66.2,42.4 73.219,42.4 73.6,42 73.6,38.625 69.993,34.936 69.993,27.1 70.425,26.6 74.2,26.6 76.7,29.6 76.7,40.819 72.859,45.2 64.7,45.2 58.6,39.1 58.6,24.7 61.6,21.7 64.8,21.7 65.3,22.2 65.3,23.6 64.8,24.1 62.6,24.1
  region net A_GND: 67.152,41.308 62.8,36.955 62.8,27.2 63,27.2 66,24.2 66,20.3 65.2,19.5 63,19.5 62.6,19.1 62.6,7.9 62.7,7.9 63.9,6.7 68.1,6.7 69.4,8 69,8.4 69,41
  region net NetC6_1: 78.1,24.5 76,24.5 72.7,21.2 72.7,8.8 76.7,4.8 85.8,4.8 86.8,5.8 86.8,9.3 87.2,9.7 87.9,9.7 88.808,10.608 88.808,13.192 87.8,14.2 82.6,14.2 79.6,17.161 79.6,24 79.1,24.5
  region net Net1_4: 34.9,28.5 36.622,28.5 41.539,32.4 49.093,32.4 50.5,30.928 50.5,25.2 53.8,21.9 56.829,21.9 57.6,22.5 57.6,23.5 56.8,24.3 55,24.3 52.9,26.4 52.9,43.1 50.1,45.9 37.4,45.9 34.3,42.8 34.3,29.1
  region net Net1_2: 54.2,43.391 55.762,45 58.257,45 59.7,43.737 59.7,41.3 57.8,39.4 57.8,28.9 56.1,27.2 54.967,27.2 54.2,28.6
  region net NetFuse_1: 26,46.5 26,39.2 27.787,37.4 30.637,37.4 32,39.077 32,46.5
Bottom Layer:
  region net A_GND: 68.7,38.9 73.45,42.9 78.397,42.9 79.5,41.797 79.5,47.6 81.5,49.6 74.7,49.6 66,41.657 66,39.8 66.9,38.9
  region net GND: 115.467,4.2 113,5.68 113,32.981 110.781,35.2 108.5,35.2 107.2,33.9 107.2,26.74 105.917,25.2 101.8,25.2 100.6,26.4 100.6,38.1 100.2,38.5 98.8,39.9 98.8,46.3 96.6,48.5 96.3,48.8 96.3,49.4 96.6,49.7 101,49.7 104.8,49.7 117.4,37.1 117.4,4.2
  region net NetC2_2: 28.8,11.3 30.675,11.3 35.117,7.2 40,7.2 41.5,8.7 41.5,18.5 44.8,21.8 57.8,21.8 61.2,18.4 61.2,4.1 58.6,1.5 31.4,1.5 27.8,1.5 25.98,3.32 26.012,8.512
  region net NetC2_1: 35.5,8 38,8 39.1,9.1 39.1,18.3 36.6,21.4 34.2,21.4 32.845,20.045 32.8,10.7
  region net NetC6_1: 70,23.2 70.8,23.9 74.9,23.9 77.6,21.2 77.6,8.7 76.6,7.7 73.3,7.7 70,11 70,13.5
  region net Net1_2: 48.4,29 52.2,29 61.3,38.1 61.3,40.4 59,42.7 55.3,42.7 46.9,34.3 46.9,30.286
  region net A_GND: 65,11.32 65,9.6 73.6,1 89.633,1 90.7,1.96 90.7,3.3 89.9,4.1 75.9,4.1 67.7,12.3 65.754,12.3

## Text inside footprints (layer, text, board x,y; h text height)
1: Top Overlay "~" at 53.7,20.9 h0.5 r180; Top Overlay "~" at 53.7,30.2 h0.5 r180; Top Overlay "+" at 64.8,20.6 h0.5 r90; Top Overlay "-" at 65,30.1 h0.5 r180
U1: Top Overlay "REFDES" at 95.445,16.957 h0.5 r90; Top Overlay "RefDes" at 95.445,17.275 h0.5 r90; Top Overlay "*" at 78.148,11.242 h0.5 r90; Mechanical 13 "RefDes2" at 95.445,16.957 h0.5 r90; Mechanical 13 "*" at 85.92,11.242 h0.5 r90
U2: Mechanical 13 "*" at 88.869,41.494 h0.5; Bottom Overlay "*" at 90.152,42.676 h0.5
U3: Top Overlay "RefDes" at 88.198,32.681 h0.5 r90; Top Overlay "*" at 94.535,30.712 h0.5 r90; Top Overlay "REFDES" at 88.198,32.363 h0.5 r90; Mechanical 13 "RefDes2" at 88.198,32.363 h0.5 r90; Mechanical 13 "*" at 91.055,31.982 h0.5 r90